# Altium PCB 20K Control Board V1.1.PcbDoc (part 18 of 24)
Units mm, origin at the board's own origin, x right, y up, seen from the top; angles counter-clockwise.
Board outline 132 x 260 mm, 4 copper layers (Top Layer, GND, VCC, Bottom Layer); 1384 components, 779 nets, 4515 pads, 1774 vias.
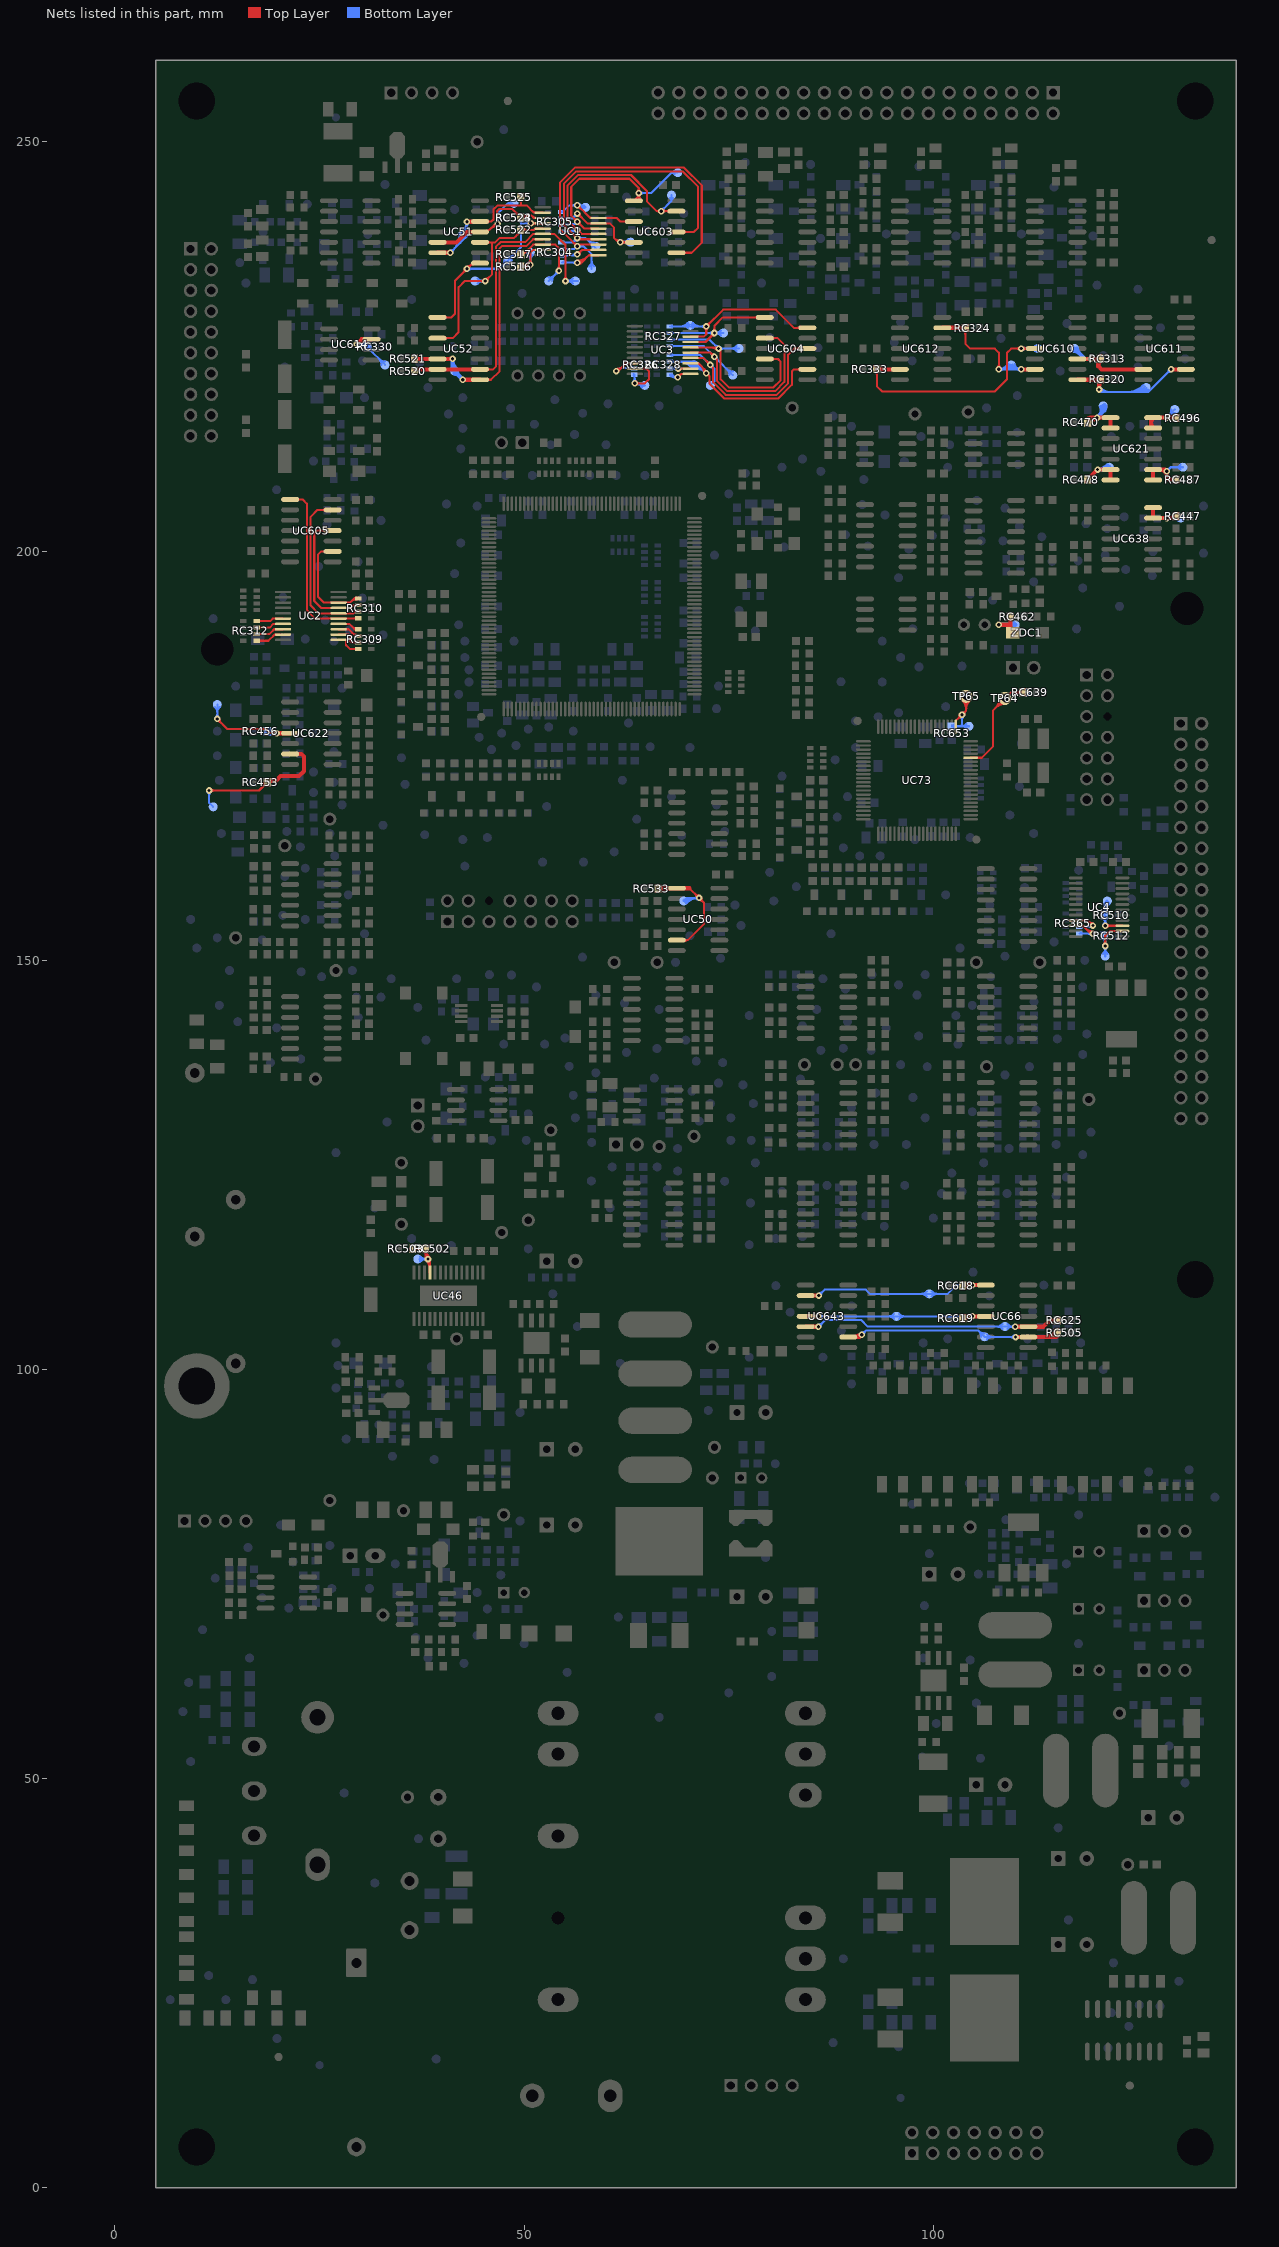
[diagram p20: the nets of this part, all layers, seen from the top]

## Via types
v1: diameter 0.8, hole 0.4, Top Layer to Bottom Layer, tented both sides, 1354 vias
v2: diameter 1.2, hole 0.7, Top Layer to Bottom Layer, 261 vias
v3: diameter 0.8, hole 0.4, Top Layer to Bottom Layer, 58 vias
v4: diameter 1.2, hole 0.7, Top Layer to Bottom Layer, tented top, 58 vias
v5: diameter 0.8, hole 0.4, Top Layer to Bottom Layer, tented top, 22 vias
v6: diameter 1.2, hole 0.7, Top Layer to Bottom Layer, tented both sides, 13 vias
v7: diameter 1.2, hole 0.7, Top Layer to Bottom Layer, tented bottom, 8 vias

## Nets (pads, with @x,y where several pads share a name; then routed paths per layer and width w, separated by ;. In a path a pad name is that pad's centre, name@x,y a point inside that pad or via, vN(x,y) a via of type N, cw(c..) or ccw(c..) an arc to the next point about the centre after c; other vN are vias at no path point) (continued)
NetRC304_1: pad.ICT@58.75,237.25 RC304.1 UC1.14 UC603.11 | length 47.2
  Top Layer w0.25: 55.987,238.737 ccw(c56.5,239.25) v1@56.5,238.525 ; 56.048,238.676 cw(c55.622,238.25) v1@56.225,238.25 ; UC1.14@59.079,238.104 56.646,238.104 v1(56.5,238.25) 56.475,238.25 54.85,239.875 54.85,244.876 56.375,246.4 56.375,246.406 69.344,246.406 71.25,244.5 71.25,239.5 70.75,239 UC603.11@68.6,239 ; UC603.11@69.524,238.876 cw(c69.822,238.578) 69.822,239 cw(c69.822,239.422) UC603.11@69.524,239.124
  Bottom Layer w0.25: RC304.1@54.55,237.7 55.925,237.7 56.475,238.25 v1(56.5,238.25) 57.5,238.25 pad.ICT@58.75,237 ; RC304.1@54.788,237.612 cw(c55.002,237.398) 55.002,237.7 cw(c55.002,238.002) RC304.1@54.788,237.788 ; 55.987,237.763 cw(c56.5,237.25) v1@56.5,237.975 ; 56.048,237.824 ccw(c55.622,238.25) v1@56.225,238.25 ; v1@56.694,238.056 cw(c57.164,237.586) 57.164,238.25 cw(c57.164,238.914) v1@56.694,238.444 ; 57.625,238.125 ccw(c58.712,239.212) pad.ICT@58.742,237.675 ; 58.04,237.71 ccw(c58.728,238.397) pad.ICT@58.747,237.425 ; 58.201,237.549 cw(c57.903,237.25) pad.ICT@58.325,237.25
NetRC304_2: pad.ICT@58.25,234.5 RC304.2 UC1.13 UC603.9 | length 51.8
  Top Layer w0.25: 55.987,237.737 ccw(c56.5,238.25) v1@56.5,237.525 ; 56.048,237.676 cw(c55.622,237.25) v1@56.225,237.25 ; UC1.13@59.079,237.454 56.704,237.454 v1(56.5,237.25) 56.475,237.25 54.4,239.325 54.4,245.068 56.187,246.854 56.187,246.86 67.75,246.86 ; 67.75,246.856 69.53,246.856 71.7,244.686 71.7,237.7 70.46,236.46 UC603.9@68.6,236.46 ; UC603.9@69.524,236.336 cw(c69.822,236.038) 69.822,236.46 cw(c69.822,236.882) UC603.9@69.524,236.584
  Bottom Layer w0.25: RC304.2@54.55,236.9 56.125,236.9 56.475,237.25 v1(56.5,237.25) 57.25,237.25 58.25,236.25 pad.ICT@58.25,234.5 ; RC304.2@54.788,236.812 cw(c55.002,236.598) 55.002,236.9 cw(c55.002,237.202) RC304.2@54.788,236.988 ; v1@56.694,237.056 cw(c57.164,236.586) 57.164,237.25 cw(c57.164,237.914) v1@56.694,237.444 ; pad.ICT@57.949,234.801 ccw(c57.224,235.526) 58.25,235.526 ccw(c59.276,235.526) pad.ICT@58.551,234.801
NetRC304_3: RC304.3 UC1.12 | length 7.7
  Top Layer w0.25: v1@56.5,236.525 ccw(c56.5,237.25) 57.013,236.737 ; v1@56.525,236.25 57.079,236.804 UC1.12@59.079,236.804 ; v1@56.775,236.25 cw(c57.378,236.25) 56.952,236.676
  Bottom Layer w0.25: RC304.3@54.55,236.1 56.35,236.1 v1(56.5,236.25) ; RC304.3@54.788,236.012 cw(c55.002,235.798) 55.002,236.1 cw(c55.002,236.402) RC304.3@54.788,236.188 ; 55.474,236.1 ccw(c55.474,237.276) v1@56.306,236.444 ; 56.078,236.1 ccw(c56.078,236.672) v1@56.482,236.268
NetRC304_4: RC304.4 UC1.11 | length 9.9
  Top Layer w0.25: v1@56.5,235.025 ccw(c56.5,235.689) 56.969,235.219 ; v1(56.5,235.25) 57,235.25 57.904,236.154 UC1.11@59.079,236.154 ; v1@56.5,235.275 ccw(c56.5,236.542) 57.396,235.646 ; v1@56.5,235.525 ccw(c56.5,237.396) 57.823,236.073 ; v1@56.732,235.103 cw(c57,234.933) 57,235.25 cw(c57,235.567) v1@56.732,235.397
  Bottom Layer w0.25: RC304.4@54.6,235.25 v1(56.5,235.25) ; RC304.4@54.788,235.388 ccw(c55.122,235.722) 55.122,235.25 ; v1@56.306,235.056 ccw(c55.836,234.586) 55.836,235.25 ccw(c55.836,235.914) v1@56.306,235.444
NetRC305_1: pad.8@57.5,242 RC305.1 UC1.18 UC603.3 | length 19.2
  Top Layer w0.25: v1(56.5,242.25) 56.525,242.25 58.071,240.704 UC1.18@59.079,240.704 61.296,240.704 61.73,240.27 UC603.3@63.4,240.27 ; 57.917,240.858 ccw(c58.229,241.17) UC1.18@58.229,240.729 ; UC603.3@62.476,240.146 ccw(c62.178,239.848) 62.178,240.27 ccw(c62.178,240.692) UC603.3@62.476,240.394 ; v1@56.5,241.975 cw(c56.5,241.25) 57.013,241.763 ccw(c56.5,241.25) v1@56.5,241.975 ; v1@56.775,242.25 ccw(c57.378,242.25) 56.952,241.824 cw(c57.378,242.25) v1@56.775,242.25
  Bottom Layer w0.25: RC305.1@54.55,241.45 54.7,241.45 55.5,242.25 v1(56.5,242.25) ; RC305.1@54.7,241.575 ccw(c54.7,241.877) 54.913,241.663 ccw(c55.127,241.45) RC305.1@54.825,241.45 ; v1@56.694,242.056 cw(c57.164,241.586) 57.164,242.25 cw(c57.164,242.914) v1@56.694,242.444 ; v1@56.87,242.25 cw(c56.87,241.746) pad.8@57.338,241.935 ; pad.8@57.106,241.841 ccw(c56.5,241.597) v1(56.5,242.25) ; pad.8@57.5,242 57.25,242.25 v1(56.5,242.25) ; 55.836,242.25 ccw(c55.836,242.914) 56.306,242.444 cw(c55.836,242.914) 55.836,242.25 ; 55.836,242.25 cw(c55.836,241.586) 56.306,242.056 ccw(c55.836,241.586) 55.836,242.25
NetRC305_2: pad.ICT@63,237.75 RC305.2 UC1.17 UC603.5 | length 20
  Top Layer w0.25: v1@56.5,240.975 cw(c56.5,240.25) 57.013,240.763 ; v1(56.5,241.25) 56.525,241.25 57.721,240.054 UC1.17@59.079,240.054 60.446,240.054 61,239.5 61,238.25 61.52,237.73 UC603.5@63.4,237.73 ; v1@56.775,241.25 ccw(c57.378,241.25) 56.952,240.824 ; 61.125,238.125 ccw(c61.482,238.482) v1@61.655,238.008 ; v1@61.944,237.556 cw(c62.366,237.134) UC603.5@62.366,237.73 ; v1@61.944,237.944 ccw(c62.462,238.462) UC603.5@62.462,237.73 ; UC603.5@62.476,237.606 ccw(c62.178,237.308) 62.178,237.73 ccw(c62.178,238.152) UC603.5@62.476,237.854
  Bottom Layer w0.25: RC305.2@54.55,240.65 55.875,240.65 56.475,241.25 v1(56.5,241.25) ; RC305.2@54.788,240.562 cw(c55.002,240.348) 55.002,240.65 cw(c55.002,240.952) RC305.2@54.788,240.738 ; 55.987,240.763 cw(c56.5,240.25) v1@56.5,240.975 ; 56.048,240.824 ccw(c55.622,241.25) v1@56.225,241.25 ; v1(61.75,237.75) pad.ICT@63,237.75 ; v1@61.944,237.556 cw(c62.414,237.086) 62.414,237.75 cw(c62.414,238.414) v1@61.944,237.944 ; pad.ICT@62.699,237.449 ccw(c61.974,236.724) 61.974,237.75 ccw(c61.974,238.776) pad.ICT@62.699,238.051
NetRC305_3: pad.ICT@68.75,246.25 RC305.3 UC1.16 UC603.1 | length 34.9
  Top Layer w0.25: 55.987,240.737 ccw(c56.5,241.25) v1@56.5,240.525 ; 56.048,240.676 cw(c55.622,240.25) v1@56.225,240.25 ; v1@56.475,240.25 55.75,240.975 55.75,244.5 56.75,245.5 62.864,245.5 64,244.364 ; v1@56.5,239.975 cw(c56.5,239.25) 57.013,239.763 ; v1@56.525,240.25 57.371,239.404 UC1.16@59.079,239.404 ; v1@56.775,240.25 ccw(c57.378,240.25) 56.952,239.824 ; UC603.1@63.4,242.81 64,243.41 v1(64,243.75) ; v1@63.806,243.556 cw(c63.336,243.086) 64,243.086 cw(c64.664,243.086) v1@64.194,243.556 ; v1@63.817,243.955 ccw(c63.453,244.364) 64,244.364 ; UC603.1@64,243 v1(64,243.75) ; 64,243.112 ccw(c64.502,243.112) UC603.1@64.147,242.757 ; v1@64,243.715 ccw(c65.105,243.715) UC603.1@64.324,242.934 ; v1@64.183,243.955 cw(c64.547,244.364) 64,244.364 ; v1(64,243.75) 64,244.364
  Bottom Layer w0.25: RC305.3@54.55,239.85 54.675,239.975 56.225,239.975 v1(56.5,240.25) ; RC305.3@54.788,239.762 cw(c55.304,239.246) 55.304,239.975 ; v1(64,243.75) 65.5,243.75 68,246.25 ; v1@64.194,243.556 cw(c64.664,243.086) 64.664,243.75 cw(c64.664,244.414) v1@64.194,243.944 ; pad.ICT@68.385,246.032 ccw(c68,245.801) 68,246.25 ; pad.ICT@68.385,246.468 cw(c68,246.699) 68,246.25 ; pad.ICT@68.75,246.25 68,246.25
NetRC305_4: pad.ICT@68,243.5 RC305.4 UC1.15 UC603.13 | length 38.1
  Top Layer w0.25: 55.987,239.737 ccw(c56.5,240.25) v1@56.5,239.525 ; 56.048,239.676 cw(c55.622,239.25) v1@56.225,239.25 ; v1@56.475,239.25 55.3,240.425 55.3,244.686 56.563,245.949 ; v1@56.5,238.975 cw(c56.5,238.25) 57.013,238.763 ; v1@56.525,239.25 57.021,238.754 UC1.15@59.079,238.754 ; 56.563,245.952 63.048,245.952 65,244 65,242.75 66.21,241.54 ; v1@56.775,239.25 ccw(c57.378,239.25) 56.952,238.824 ; v1@66.528,241.378 ccw(c66.21,241.147) 66.21,241.54 ; v1@66.528,241.702 cw(c66.21,241.933) 66.21,241.54 ; v1@66.944,241.346 cw(c67.414,240.876) 67.414,241.54 cw(c67.414,242.204) v1@66.944,241.734 ; UC603.13@67.676,241.416 ccw(c67.378,241.118) 67.378,241.54 ccw(c67.378,241.962) UC603.13@67.676,241.664 ; UC603.13@68.6,241.54 v1(66.75,241.54) 66.21,241.54
  Bottom Layer w0.25: RC305.4@54.55,239.05 56.3,239.05 v1(56.5,239.25) ; RC305.4@54.788,238.962 cw(c55.002,238.748) 55.002,239.05 cw(c55.002,239.352) RC305.4@54.788,239.138 ; 55.353,239.05 ccw(c55.353,240.397) v1@56.306,239.444 ; 55.957,239.05 ccw(c55.957,239.793) v1@56.482,239.268 ; v1(66.75,241.54) 68,242.79 ; v1@66.75,241.815 ccw(c66.75,242.479) 67.219,242.009 ccw(c67.689,241.54) v1@67.025,241.54 ; pad.ICT@67.799,243.125 cw(c67.619,242.79) 68,242.79 ; pad.ICT@68,243.5 68,242.79 ; pad.ICT@68.201,243.125 ccw(c68.381,242.79) 68,242.79
NetRC309_1: RC309.1 UC2.14 | length 3.4
  Top Layer w0.25: UC2.14@27.329,191.104 28.646,191.104 29.3,190.45 RC309.1@29.7,190.45 ; 28.91,190.84 ccw(c29.55,191.48) RC309.1@29.55,190.575
NetRC309_2: RC309.2 UC2.13 | length 3.3
  Top Layer w0.25: UC2.13@27.329,190.454 28.546,190.454 29.35,189.65 RC309.2@29.7,189.65 ; 28.995,190.005 ccw(c29.55,190.56) RC309.2@29.55,189.775
NetRC309_3: RC309.3 UC2.12 | length 3.6
  Top Layer w0.25: UC2.12@27.329,189.804 28.56,189.804 28.75,189.614 28.75,189 28.9,188.85 RC309.3@29.7,188.85 ; RC309.3@29.462,188.762 ccw(c29.248,188.548) 29.248,188.85 ccw(c29.248,189.152) RC309.3@29.462,188.938
NetRC309_4: RC309.4 UC2.11 | length 4
  Top Layer w0.25: UC2.11@27.329,189.154 28.096,189.154 28.25,189 28.25,188.5 28.7,188.05 RC309.4@29.7,188.05 ; UC2.11@28.161,189.136 cw(c27.947,188.922) 28.25,188.922 ; UC2.11@28.166,189.133 cw(c28.077,188.984) 28.25,188.984 ; RC309.4@29.462,187.962 ccw(c29.248,187.748) 29.248,188.05 ccw(c29.248,188.352) RC309.4@29.462,188.138
NetRC310_1: RC310.1 UC2.18 UC605.9 | length 15.2
  Top Layer w0.25: UC605.9@25.676,199.836 ccw(c25.378,199.538) 25.378,199.96 ccw(c25.378,200.382) UC605.9@25.676,200.084 ; UC605.9@26.6,199.96 25.21,199.96 24.8,199.55 24.8,194.45 25.546,193.704 UC2.18@27.579,193.704 ; UC2.18@27.329,193.704 28.704,193.704 29.2,194.2 RC310.1@29.7,194.2 ; 28.739,193.739 cw(c29.55,192.928) RC310.1@29.55,194.075 ; 29.166,194.166 cw(c29.55,193.782) RC310.1@29.55,194.325 ; RC310.1@29.462,194.112 ccw(c29.248,193.898) 29.248,194.2 ccw(c29.248,194.502) RC310.1@29.462,194.288
NetRC310_2: RC310.2 UC2.17 UC605.11 | length 17.8
  Top Layer w0.25: UC605.11@25.676,202.376 ccw(c25.378,202.078) 25.378,202.5 ccw(c25.378,202.922) UC605.11@25.676,202.624 ; UC605.11@26.6,202.5 24.75,202.5 24.35,202.1 24.35,193.9 25.196,193.054 UC2.17@27.329,193.054 ; UC2.17@27.579,193.054 UC2.17@27.329,193.054 ; RC310.2@29.462,193.312 ccw(c29.248,193.098) 29.248,193.4 ccw(c29.248,193.702) RC310.2@29.462,193.488 ; RC310.2@29.7,193.4 29.15,193.4 28.804,193.054 UC2.17@27.329,193.054
NetRC310_3: RC310.3 UC2.16 UC605.13 | length 21.1
  Top Layer w0.25: UC605.13@25.676,204.916 ccw(c25.378,204.618) 25.378,205.04 ccw(c25.378,205.462) UC605.13@25.676,205.164 ; UC605.13@26.6,205.04 24.75,205.04 23.9,204.19 23.9,193.35 24.846,192.404 UC2.16@27.329,192.404 ; UC2.16@27.579,192.404 UC2.16@27.329,192.404 ; RC310.3@29.7,192.6 29.35,192.6 29.154,192.404 UC2.16@27.329,192.404
NetRC310_4: RC310.4 UC2.15 UC605.1 | length 23.4
  Top Layer w0.25: UC605.1@21.4,206.31 22.94,206.31 23.45,205.8 23.45,197.75 ; UC605.1@22.324,206.186 cw(c22.622,205.888) 22.622,206.31 cw(c22.622,206.732) UC605.1@22.324,206.434 ; 23.45,197.5 23.45,197.75 ; UC2.15@27.579,191.754 UC2.15@27.329,191.754 ; 29.137,191.754 ccw(c29.137,192.213) RC310.4@29.462,191.888 ; RC310.4@29.654,191.754 UC2.15@27.329,191.754 ; 23.45,197.75 23.45,192.8 24.496,191.754 UC2.15@27.329,191.754
NetRC312_1: RC312.1 UC2.9 | length 4.7
  Top Layer w0.25: RC312.1@17.3,189.05 18.746,189.05 19.5,189.804 UC2.9@20.529,189.804 ; RC312.1@17.538,188.962 cw(c17.752,188.748) 17.752,189.05 cw(c17.752,189.352) RC312.1@17.538,189.138 ; 19.331,189.635 cw(c19.679,189.287) UC2.9@19.679,189.779 ; 19.411,189.715 cw(c19.596,189.529) UC2.9@19.672,189.78
NetRC312_2: RC312.2 UC2.8 | length 4.8
  Top Layer w0.25: RC312.2@17.3,189.85 18.85,189.85 19.454,190.454 UC2.8@20.529,190.454 ; RC312.2@17.538,189.762 cw(c17.752,189.548) 17.752,189.85 cw(c17.752,190.152) RC312.2@17.538,189.938 ; 19.252,190.252 cw(c19.679,189.825) UC2.8@19.679,190.429 ; 19.342,190.342 cw(c19.583,190.1) UC2.8@19.672,190.43
NetRC312_3: RC312.3 UC2.7 | length 3.9
  Top Layer w0.25: RC312.3@17.3,190.65 18.9,190.65 19.354,191.104 UC2.7@20.529,191.104 ; RC312.3@17.538,190.562 cw(c17.752,190.348) 17.752,190.65 cw(c17.752,190.952) RC312.3@17.538,190.738
NetRC312_4: RC312.4 UC2.6 | length 3.8
  Top Layer w0.25: RC312.4@17.3,191.45 18.95,191.45 19.254,191.754 UC2.6@20.529,191.754 ; RC312.4@17.538,191.362 cw(c17.752,191.148) 17.752,191.45 cw(c17.752,191.752) RC312.4@17.538,191.538
NetRC313_1: pad.ICT@117.25,224.75 RC313.1 UC610.10 UC611.6 | length 13.5
  Top Layer w0.5: UC610.10@117.6,223.48 RC313.1@120.13,223.48 ; 119.869,223.48 ccw(c119.869,224.031) RC313.1@120.259,223.641 ; 120.15,222.564 cw(c121.047,222.564) RC313.1@120.518,223.288 ; RC313.1@120.15,223.5 120.15,222.6 120.54,222.21 UC611.6@125.15,222.21
  Bottom Layer w0.5: pad.ICT@117.25,224.45 cw(c117.25,223.726) 117.762,224.238 cw(c118.274,224.75) pad.ICT@117.55,224.75 ; pad.ICT@117.25,224.75 118.52,223.48 v1(119.25,223.48)
NetRC320_1: pad.ICT@126,220 RC320.1 UC610.8 UC611.9 | length 27.3
  Top Layer w0.5: UC610.8@117.6,220.94 120.34,220.94 120.25,220.85 v1(120.25,219.75) ; 119.893,220.94 ccw(c119.893,221.457) RC320.1@120.259,221.091 ; 119.941,220.94 cw(c119.941,220.491) RC320.1@120.259,220.809 ; v1@120.25,220.105 cw(c121.245,220.105) RC320.1@120.541,220.809 ; v1(129.04,222.21) UC611.9@130.85,222.21
  Bottom Layer w0.25: v1(120.25,219.75) 120.55,219.45 126.28,219.45 v1(129.04,222.21) ; v1@120.268,219.768 ccw(c121.035,220.535) 121.035,219.45 ; v1@120.444,219.944 ccw(c121.638,221.138) 121.638,219.45 ; 123.646,219.45 ccw(c123.646,222.354) pad.ICT@125.699,220.301 ; 124.25,219.45 ccw(c124.25,221.75) pad.ICT@125.876,220.124 ; 124.853,219.45 ccw(c124.853,221.147) pad.ICT@126.053,219.947 ; 125.457,219.45 ccw(c125.457,220.543) pad.ICT@126.23,219.77 ; 126.06,219.45 ccw(c126.06,219.94) 126.407,219.593 ; v1@128.765,222.21 cw(c128.101,222.21) 128.571,221.741 cw(c129.04,221.271) v1@129.04,221.935
NetRC324_1: pad.ICT@109.5,222.75 RC324.1 UC610.6 UC612.13 | length 31.6
  Top Layer w0.25: RC324.1@103.67,226.97 cw(c103.115,226.415) 103.9,226.415 cw(c104.685,226.415) RC324.1@104.13,226.97 ; RC324.1@103.9,227.25 103.9,225.35 104.5,224.75 107.5,224.75 108,224.25 v1(108,222.21) ; v1@107.806,222.404 ccw(c107.336,222.874) 108,222.874 ccw(c108.664,222.874) v1@108.194,222.404
  Top Layer w0.5: UC612.13@101.1,227.29 RC324.1@103.61,227.29 ; 103.393,227.29 ccw(c103.393,227.807) RC324.1@103.759,227.441 ; 103.441,227.29 cw(c103.441,226.841) RC324.1@103.759,227.159 ; v1(110.75,222.21) UC610.6@112.4,222.21
  Bottom Layer w0.25: v1@108.194,222.016 cw(c108.664,221.546) 108.664,222.21 cw(c108.664,222.874) v1@108.194,222.404 ; v1@108.389,222.21 ccw(c108.389,223.256) pad.ICT@109.341,222.823 ; 108.777,222.21 ccw(c108.777,223.079) pad.ICT@109.568,222.719 ; 108.944,222.604 ccw(c109.455,222.738) pad.ICT@109.455,222.21 ; 108.96,222.21 pad.ICT@109.5,222.75 110.04,222.21 ; pad.ICT@109.113,222.926 cw(c108,223.433) 108,222.21 v1(110.75,222.21) cw(c110.75,223.077) pad.ICT@109.911,222.858 ; 109.166,222.21 ccw(c109.166,222.902) pad.ICT@109.796,222.615 ; pad.ICT@109.186,222.668 ccw(c109.778,222.823) 109.778,222.21 ; pad.ICT@109.427,222.731 ccw(c110.102,222.908) 110.102,222.21 ; pad.ICT@109.554,222.21 ccw(c109.554,222.725) 110.023,222.512 ; pad.ICT@109.669,222.794 ccw(c110.426,222.992) v1@110.426,222.21 ; v1@110.556,222.016 ccw(c110.086,221.546) 110.086,222.21 ccw(c110.086,222.874) v1@110.556,222.404
NetRC326_1: pad.ICT@64.75,220.25 RC326.1 UC3.9 | length 12.6
  Top Layer w0.25: v1(63.5,220.5) 64.75,220.5 65.25,221 65.25,222 64.946,222.304 UC3.9@63.529,222.304 ; v1@63.694,220.306 cw(c64.164,219.836) 64.164,220.5 cw(c64.164,221.164) v1@63.694,220.694
  Bottom Layer w0.25: v1@63.306,220.694 ccw(c62.836,221.164) 63.5,221.164 ccw(c64.164,221.164) v1@63.694,220.694 ; RC326.1@63.349,221.651 RC326.1@63.45,221.55 ; RC326.1@63.362,221.462 cw(c63.028,221.128) 63.5,221.128 ; v1(63.5,220.5) RC326.1@63.5,221.5
  Bottom Layer w0.254: v1@63.693,220.307 cw(c64.159,219.841) 64.159,220.5 cw(c64.159,221.159) v1@63.693,220.693 ; 63.972,220.5 cw(c63.972,219.737) pad.ICT@64.609,220.157 ; pad.ICT@64.397,220.017 ccw(c63.5,219.426) v1(63.5,220.5) 64.5,220.5 pad.ICT@64.75,220.25
NetRC326_2: RC326.2 UC3.8 | length 7.8
  Top Layer w0.25: v1(61.25,222) 61.5,222 62.454,222.954 UC3.8@63.529,222.954 ; v1@61.25,222.025 ccw(c61.25,222.689) 61.719,222.219 ; v1@61.25,222.275 ccw(c61.25,223.542) 62.146,222.646 ; 62.252,222.752 cw(c62.679,222.325) UC3.8@62.679,222.929 ; 62.342,222.842 cw(c62.583,222.6) UC3.8@62.672,222.93
  Bottom Layer w0.25: v1(61.25,222) 61.275,222 61.625,222.35 RC326.2@63.45,222.35 ; RC326.2@63.212,222.262 ccw(c62.998,222.048) 62.998,222.35 ccw(c62.998,222.652) RC326.2@63.212,222.438
NetRC327_1: pad.ICT@70.3,227.583 RC327.1 UC3.18 UC604.13 | length 30.4
  Top Layer w0.25: UC3.18@70.329,226.204 71.954,226.204 72.25,226.5 v1(72.25,227.45) 74.3,229.5 80.75,229.5 82.96,227.29 UC604.13@84.6,227.29 ; v1@72.056,227.256 cw(c71.586,226.786) 72.25,226.786 cw(c72.914,226.786) v1@72.444,227.256 ; v1@72.25,227.725 ccw(c72.25,228.389) 72.719,227.919 ccw(c73.189,227.45) v1@72.525,227.45 ; UC604.13@83.676,227.166 ccw(c83.378,226.868) 83.378,227.29 ccw(c83.378,227.712) UC604.13@83.676,227.414
  Bottom Layer w0.25: RC327.1@67.8,227.45 v1(72.25,227.45) ; RC327.1@68.038,227.362 cw(c68.252,227.148) 68.252,227.45 cw(c68.252,227.752) RC327.1@68.038,227.538 ; 68.953,227.45 ccw(c68.953,228.93) pad.ICT@69.999,227.884 ; 69.556,227.45 ccw(c69.556,228.327) pad.ICT@70.176,227.707 ; 69.595,227.45 cw(c69.595,226.878) pad.ICT@69.999,227.282 ; pad.ICT@70.424,227.707 ccw(c71.044,228.327) 71.044,227.45 ; pad.ICT@70.601,227.282 cw(c71.005,226.878) 71.005,227.45 ; pad.ICT@70.601,227.884 ccw(c71.647,228.93) 71.647,227.45 ; v1@72.056,227.256 ccw(c71.586,226.786) 71.586,227.45 ccw(c71.586,228.114) v1@72.056,227.644
NetRC327_2: pad.ICT@74.35,226.65 RC327.2 UC3.17 UC604.1 | length 24.3
  Top Layer w0.25: UC3.17@70.329,225.554 72.154,225.554 v1(73.25,226.65) 73.25,227.56 74.25,228.56 UC604.1@79.4,228.56 ; v1@72.975,226.65 cw(c72.311,226.65) 72.781,226.181 cw(c73.25,225.711) v1@73.25,226.375 ; v1@73.056,226.844 ccw(c72.586,227.314) 73.25,227.314 ccw(c73.914,227.314) v1@73.444,226.844 ; UC604.1@78.476,228.436 ccw(c78.178,228.138) 78.178,228.56 ccw(c78.178,228.982) UC604.1@78.476,228.684
  Bottom Layer w0.25: RC327.2@67.8,226.65 v1(73.25,226.65) pad.ICT@74.35,226.65 ; RC327.2@68.038,226.562 cw(c68.252,226.348) 68.252,226.65 cw(c68.252,226.952) RC327.2@68.038,226.738 ; v1@73.056,226.456 ccw(c72.586,225.986) 72.586,226.65 ccw(c72.586,227.314) v1@73.056,226.844 ; v1@73.444,226.456 cw(c73.914,225.986) 73.914,226.65 cw(c73.914,227.314) v1@73.444,226.844 ; pad.ICT@74.049,226.349 ccw(c73.324,225.624) 73.324,226.65 ccw(c73.324,227.676) pad.ICT@74.049,226.951
NetRC327_3: pad.ICT@76.25,224.75 RC327.3 UC3.16 UC604.5 | length 34.7
  Top Layer w0.25: UC3.16@70.329,224.904 v1@73.596,224.904 ; 72.714,224.904 cw(c72.714,223.714) v1@73.556,224.556 ; 73.318,224.904 cw(c73.318,224.318) v1@73.732,224.732 ; v1(73.75,224.75) 74,224.5 74,221 75,220 80.469,220 81.344,220.875 81.344,223.156 81.02,223.48 UC604.5@79.4,223.48 ; UC604.5@80.324,223.356 cw(c80.622,223.058) 80.622,223.48 cw(c80.622,223.902) UC604.5@80.324,223.604
  Bottom Layer w0.25: RC327.3@67.8,225.85 72.65,225.85 v1(73.75,224.75) pad.ICT@76.25,224.75 ; RC327.3@68.038,225.762 cw(c68.252,225.548) 68.252,225.85 cw(c68.252,226.152) RC327.3@68.038,225.938 ; v1@73.475,224.75 ccw(c72.811,224.75) 73.281,225.219 ccw(c73.75,225.689) v1@73.75,225.025 ; v1@73.944,224.556 cw(c74.414,224.086) 74.414,224.75 cw(c74.414,225.414) v1@73.944,224.944 ; pad.ICT@75.949,224.449 ccw(c75.224,223.724) 75.224,224.75 ccw(c75.224,225.776) pad.ICT@75.949,225.051
NetRC327_4: pad.ICT@75.5,221.5 RC327.4 UC3.15 UC604.3 | length 37.3
  Top Layer w0.25: UC3.15@70.329,224.254 72.746,224.254 v1(73.25,223.75) ; v1@72.975,223.75 ccw(c72.311,223.75) 72.781,224.219 ccw(c73.25,224.689) v1@73.25,224.025 ; 73.548,223.452 73.548,220.816 74.814,219.55 80.655,219.55 81.796,220.691 81.796,225.204 80.98,226.02 UC604.3@79.4,226.02 ; UC604.3@80.324,225.896 cw(c80.622,225.598) 80.622,226.02 cw(c80.622,226.442) UC604.3@80.324,226.144
  Bottom Layer w0.25: RC327.4@67.8,225.05 71.95,225.05 v1(73.25,223.75) pad.ICT@75.5,221.5 ; RC327.4@68.038,224.962 cw(c68.252,224.748) 68.252,225.05 cw(c68.252,225.352) RC327.4@68.038,225.138 ; v1@72.975,223.75 ccw(c72.311,223.75) 72.781,224.219 ccw(c73.25,224.689) v1@73.25,224.025 ; v1@73.25,223.475 cw(c73.25,222.811) 73.719,223.281 cw(c74.189,223.75) v1@73.525,223.75 ; pad.ICT@75.075,221.5 ccw(c74.049,221.5) 74.774,222.226 ccw(c75.5,222.951) pad.ICT@75.5,221.925
NetRC328_1: pad.ICT@72.75,220.25 RC328.1 UC3.14 UC604.11 | length 34.5
  Top Layer w0.25: UC3.14@70.329,223.604 71.896,223.604 v1(72.75,222.75) 73.094,222.406 73.094,220.633 74.627,219.1 80.842,219.1 ; v1@72.475,222.75 ccw(c71.811,222.75) 72.281,223.219 ccw(c72.75,223.689) v1@72.75,223.025 ; 80.847,219.094 82.25,220.497 82.25,224 83,224.75 UC604.11@84.6,224.75 ; UC604.11@83.676,224.626 ccw(c83.378,224.328) 83.378,224.75 ccw(c83.378,225.172) UC604.11@83.676,224.874
  Bottom Layer w0.25: RC328.1@67.8,223.95 71.55,223.95 v1(72.75,222.75) ; RC328.1@68.038,223.862 cw(c68.252,223.648) 68.252,223.95 cw(c68.252,224.252) RC328.1@68.038,224.038 ; v1@72.475,222.75 ccw(c71.811,222.75) 72.281,223.219 ccw(c72.75,223.689) v1@72.75,223.025 ; pad.ICT@72.75,220.25 73.25,220.75 73.25,222.25 v1(72.75,222.75) ; v1@72.75,222.475 cw(c72.75,221.811) 73.219,222.281 cw(c73.689,222.75) v1@73.025,222.75 ; v1@73,222.5 v1(72.75,222.75)
NetRC328_2: pad.ICT@70.75,222.75 RC328.2 UC3.13 UC604.9 | length 36.2
  Top Layer w0.25: UC3.13@70.329,222.954 71.296,222.954 72.25,222 v1(72.25,221.75) 72.644,221.356 72.644,220.447 74.446,218.644 81.034,218.644 82.7,220.311 82.7,220.313 ; UC3.13@71.179,222.929 cw(c71.179,222.586) 71.421,222.829 ; 71.604,222.646 cw(c70.708,221.75) v1@71.975,221.75 ; 72.031,222.219 cw(c71.561,221.75) v1@72.225,221.75 ; 82.702,220.313 82.702,221.952 82.96,222.21 UC604.9@84.6,222.21 ; UC604.9@83.676,222.086 ccw(c83.378,221.788) 83.378,222.21 ccw(c83.378,222.632) UC604.9@83.676,222.334
  Bottom Layer w0.25: RC328.2@67.8,223.15 70.85,223.15 v1(72.25,221.75) ; RC328.2@68.038,223.062 cw(c68.252,222.848) 68.252,223.15 cw(c68.252,223.452) RC328.2@68.038,223.238 ; 68.758,223.15 cw(c68.758,220.758) pad.ICT@70.449,222.449 ; 69.362,223.15 cw(c69.362,221.362) pad.ICT@70.626,222.626 ; 69.965,223.15 cw(c69.965,221.965) pad.ICT@70.803,222.803 ; pad.ICT@70.75,222.325 cw(c70.75,220.092) v1@72.329,221.671 ; pad.ICT@70.75,222.575 cw(c70.75,220.945) 71.902,222.098 ; pad.ICT@70.75,222.825 cw(c70.75,221.799) 71.476,222.524 ; v1@71.975,221.75 ccw(c71.311,221.75) 71.781,222.219 ccw(c72.25,222.689) v1@72.25,222.025
NetRC328_3: RC328.3 UC3.12 | length 4.9
  Top Layer w0.25: v1(68.804,222.304) UC3.12@70.329,222.304 ; v1@68.998,222.11 cw(c69.468,221.64) 69.468,222.304 cw(c69.468,222.968) v1@68.998,222.498
  Bottom Layer w0.25: RC328.3@67.846,222.304 v1(68.804,222.304) ; RC328.3@68.038,222.438 ccw(c68.363,222.763) 68.363,222.304 ; v1@68.61,222.11 ccw(c68.14,221.64) 68.14,222.304 ccw(c68.14,222.968) v1@68.61,222.498
NetRC328_4: RC328.4 UC3.11 | length 5.7
  Top Layer w0.25: v1(68.75,221.25) 68.778,221.25 69.182,221.654 ; v1@68.788,221.522 ccw(c68.853,221.983) 69.182,221.654 ; v1@69.025,221.258 cw(c69.562,221.274) 69.182,221.654 ; UC3.11@70.329,221.654 69.182,221.654
  Bottom Layer w0.25: RC328.4@67.8,221.55 67.95,221.55 68.25,221.25 ; RC328.4@67.846,221.48 ccw(c68.279,221.773) 68.279,221.25 ; RC328.4@68.054,221.62 ccw(c68.75,222.09) v1(68.75,221.25) 68.25,221.25 ; v1@68.518,221.103 ccw(c68.25,220.933) 68.25,221.25 ; v1@68.518,221.397 cw(c68.25,221.567) 68.25,221.25
NetRC330_2: pad.ICT@33,222.75 RC330.2 UC614.7 | length 11.9
  Top Layer w0.5: v1(29.5,225.25) 30.135,225.885 UC614.7@31.35,225.885 ; v1@29.756,225.506 cw(c30.55,224.712) UC614.7@30.55,225.835 ; 29.928,225.678 cw(c30.368,225.237) UC614.7@30.536,225.837
  Bottom Layer w0.25: RC330.2@30.9,224.625 cw(c30.9,224.082) 31.284,224.466 ; RC330.2@30.9,225 30.9,224.85 pad.ICT@33,222.75 ; RC330.2@31.225,224.95 ccw(c32.251,224.95) 31.526,224.224 ; pad.ICT@32.575,222.75 ccw(c31.549,222.75) 32.274,223.476 ccw(c33,224.201) pad.ICT@33,223.175
  Bottom Layer w0.5: v1(29.5,225.25) RC330.2@30.9,225.25 ; 29.934,225.25 cw(c29.934,224.084) RC330.2@30.759,224.909
NetRC333_1: pad.ICT@112.75,224.75 RC333.1 UC610.4 UC612.6 | length 37.9
  Top Layer w0.25: RC333.1@92.87,221.97 cw(c92.315,221.415) 93.1,221.415 cw(c93.885,221.415) RC333.1@93.33,221.97 ; RC333.1@93.1,222.25 93.1,220.15 93.75,219.5 107.5,219.5 109,221 109,224.25 109.5,224.75 UC610.4@112.4,224.75 ; v1@110.556,224.556 ccw(c110.086,224.086) 110.086,224.75 ccw(c110.086,225.414) v1@110.556,224.944 ; v1@110.944,224.556 cw(c111.414,224.086) 111.414,224.75 cw(c111.414,225.414) v1@110.944,224.944 ; UC610.4@111.476,224.626 ccw(c111.178,224.328) 111.178,224.75 ccw(c111.178,225.172) UC610.4@111.476,224.874
  Top Layer w0.5: RC333.1@93.14,222.21 UC612.6@95.9,222.21 ; RC333.1@93.241,222.059 cw(c93.607,221.693) 93.607,222.21 ; RC333.1@93.241,222.341 ccw(c93.559,222.659) 93.559,222.21
  Bottom Layer w0.25: v1(110.75,224.75) pad.ICT@112.75,224.75 ; v1@110.944,224.556 cw(c111.414,224.086) 111.414,224.75 cw(c111.414,225.414) v1@110.944,224.944 ; pad.ICT@112.449,224.449 ccw(c111.724,223.724) 111.724,224.75 ccw(c111.724,225.776) pad.ICT@112.449,225.051
NetRC365_7: RC365.7 UC4.9 | length 7
  Top Layer w0.25: UC4.9@117.4,154.875 118.85,154.875 v1@119.475,154.25 ; 118.987,154.737 ccw(c119.5,155.25) v1@119.5,154.525 ; 119.048,154.676 cw(c118.622,154.25) v1@119.225,154.25
  Bottom Layer w0.25: RC365.7@117.8,154.1 119.35,154.1 v1(119.5,154.25) ; RC365.7@118.038,154.012 cw(c118.252,153.798) 118.252,154.1 cw(c118.252,154.402) RC365.7@118.038,154.188 ; 118.474,154.1 ccw(c118.474,155.276) v1@119.306,154.444 ; 119.078,154.1 ccw(c119.078,154.672) v1@119.482,154.268
NetRC365_8: RC365.8 UC4.10 | length 7.9
  Top Layer w0.25: UC4.10@117.4,154.225 118.275,154.225 119.25,153.25 v1(119.5,153.25) ; UC4.10@118.075,154.175 cw(c118.075,153.571) 118.502,153.998 ; UC4.10@118.095,154.179 cw(c118.195,153.945) 118.375,154.125 ; 118.604,153.896 ccw(c119.5,154.792) v1@119.5,153.525 ; 119.031,153.469 ccw(c119.5,153.939) v1@119.5,153.275
  Bottom Layer w0.25: RC365.8@117.85,153.25 v1(119.5,153.25) ; RC365.8@118.038,153.388 ccw(c118.372,153.722) 118.372,153.25 ; v1@119.306,153.056 ccw(c118.836,152.586) 118.836,153.25 ccw(c118.836,153.914) v1@119.306,153.444
NetRC447_2: pad.ICT@130.21,204.04 RC447.2 UC638.13 UC638.14 | length 9
  Top Layer w0.5: UC638.14@126.85,205.31 UC638.13@126.85,204.04 RC447.2@129.44,204.04 ; v1@128.781,204.04 ccw(c128.781,205.069) RC447.2@129.509,204.341
  Bottom Layer w0.25: v1(128.5,204.04) pad.ICT@130.21,204.04 ; v1@128.694,203.846 cw(c129.164,203.376) 129.164,204.04 cw(c129.164,204.704) v1@128.694,204.234 ; pad.ICT@129.909,203.739 ccw(c129.184,203.014) 129.184,204.04 ccw(c129.184,205.066) pad.ICT@129.909,204.341
NetRC453_2: pad.ICT@12,168.75 RC453.2 UC622.6 | length 23.7
  Top Layer w0.25: v1(11.5,170.75) 17.6,170.75 RC453.2@18.6,171.75 ; v1@11.694,170.556 cw(c12.164,170.086) 12.164,170.75 cw(c12.164,171.414) v1@11.694,170.944 ; 17.96,171.11 cw(c18.6,170.47) RC453.2@18.6,171.375 ; 18.081,171.231 ccw(c17.611,171.7) RC453.2@18.275,171.7
  Top Layer w0.5: RC453.2@18.6,172 19.25,172 ; RC453.2@18.741,171.659 cw(c19.566,170.834) 19.566,172 ; UC622.6@21.4,175.21 22.79,175.21 23.1,174.9 23.1,173.1 22.5,172.5 20.25,172.5 19.75,172 19.25,172 ; 19.25,172 ccw(c19.25,171.472) 18.779,171.71 cw(c19.25,171.472) 19.25,172
  Bottom Layer w0.25: v1@11.306,170.556 cw(c10.836,170.086) 11.5,170.086 cw(c12.164,170.086) v1@11.694,170.556 ; v1(11.5,170.75) 11.5,169.25 pad.ICT@12,168.75
NetRC456_2: pad.ICT@12.5,181.25 RC456.2 UC622.4 | length 18.3
  Top Layer w0.25: v1@12.5,179.225 cw(c12.5,178.561) 12.969,179.031 cw(c13.439,179.5) v1@12.775,179.5 ; v1(12.5,179.5) 13.75,178.25 18.5,178.25 19,177.75 v1(19.75,177.75) ; v1@19.556,177.556 ccw(c19.086,177.086) 19.086,177.75 ccw(c19.086,178.414) v1@19.556,177.944
  Top Layer w0.5: v1(19.75,177.75) UC622.4@21.4,177.75
  Bottom Layer w0.25: pad.ICT@12.199,180.949 cw(c11.474,180.224) 12.5,180.224 cw(c13.526,180.224) pad.ICT@12.801,180.949 ; v1@12.306,179.694 ccw(c11.836,180.164) 12.5,180.164 ccw(c13.164,180.164) v1@12.694,179.694 ; v1(12.5,179.5) pad.ICT@12.5,181.25
  Bottom Layer w0.5: RC456.2@18.6,178 18.85,177.75 v1(19.75,177.75) ; RC456.2@18.741,178.091 ccw(c19.566,178.916) v1@19.566,177.75
NetRC462_2: pad.ICT@110,191 RC462.2 ZDC1.1 | length 7.7
  Top Layer w0.5: v1(108,191) 109.4,191 ; RC462.2@109.259,191.809 cw(c108.917,191.467) 109.4,191.467 cw(c109.883,191.467) RC462.2@109.541,191.809 ; ZDC1.1@109.4,190.3 109.4,191 ; RC462.2@109.4,192 109.4,191 ; ZDC1.1@109.783,190.411 cw(c110.044,191) 109.4,191
  Bottom Layer w0.5: v1(108,191) pad.ICT@110,191 ; pad.ICT@109.787,190.787 ccw(c109.275,190.275) 109.275,191 ccw(c109.275,191.724) pad.ICT@109.787,191.212
NetRC470_2: pad.ICT@120.75,217.75 RC470.2 UC621.1 UC621.2 | length 14.2
  Top Layer w0.5: RC470.2@118.638,216.012 cw(c119.357,215.293) 119.357,216.31 ; RC470.2@118.737,215.637 cw(c120,214.373) v1@120,216.16 ; RC470.2@118.85,215.75 119.41,216.31 UC621.1@121.65,216.31 UC621.2@121.65,215.04 ; RC470.2@118.85,216 ccw(c118.85,216.604) RC470.2@119.277,216.177 ; RC470.2@118.991,215.659 cw(c120.564,214.086) UC621.1@120.564,216.31 ; RC470.2@119.115,216.015 cw(c119.643,215.487) v1@119.94,216.172
  Bottom Layer w0.5: v1(120,216.31) 120.75,217.06 ; 120.345,216.655 ccw(c119.774,217.226) pad.ICT@120.486,217.608 ; pad.ICT@120.545,217.531 cw(c120.107,217.06) 120.75,217.06 ; pad.ICT@120.75,217.75 120.75,217.06 ; 120.821,217.131 ccw(c120.393,217.559) pad.ICT@120.926,217.845 ; pad.ICT@120.955,217.531 ccw(c121.393,217.06) 120.75,217.06
NetRC478_2: pad.ICT@121.5,210.25 RC478.2 UC621.6 UC621.7 | length 8
  Top Layer w0.5: RC478.2@118.85,209 ccw(c118.85,209.604) RC478.2@119.277,209.177 ; RC478.2@118.91,208.69 RC478.2@118.85,208.75 v1(120.06,209.96) UC621.6@121.65,209.96 UC621.7@121.65,208.69
  Bottom Layer w0.5: v1(120.06,209.96) 121.21,209.96 pad.ICT@121.5,210.25 ; v1@120.076,209.96 ccw(c120.076,211.674) pad.ICT@121.288,210.462
NetRC487_2: pad.ICT@130.5,210.25 RC487.2 UC621.8 UC621.9 | length 12.4
  Top Layer w0.5: UC621.8@126.85,208.69 UC621.9@126.85,209.96 ; UC621.9@127.631,209.96 cw(c127.631,208.881) v1@128.394,209.644 ; UC621.9@127.79,209.96 UC621.9@126.85,209.96 ; RC487.2@129.509,208.609 ccw(c129.167,208.267) 129.167,208.75 ccw(c129.167,209.233) RC487.2@129.509,208.891 ; RC487.2@129.65,208.75 128.75,208.75 128.5,209 v1(128.5,209.75) 128.29,209.96 UC621.9@126.85,209.96
  Bottom Layer w0.25: v1(128.5,209.75) 129,210.25 pad.ICT@130.5,210.25 ; v1@128.5,210.025 ccw(c128.5,210.689) 128.969,210.219 ccw(c129.439,209.75) v1@128.775,209.75 ; pad.ICT@130.199,209.949 ccw(c129.474,209.224) 129.474,210.25 ccw(c129.474,211.276) pad.ICT@130.199,210.551
NetRC496_2: pad.ICT@129.5,217.31 RC496.2 UC621.13 UC621.14 | length 10.7
  Top Layer w0.5: UC621.13@126.6,215.04 126.6,216.31 RC496.2@129.65,216.31 ; 126.6,215.586 cw(c127.574,215.586) UC621.14@126.885,216.275 ; 126.6,215.764 ccw(c127.574,215.764) UC621.13@126.885,215.075 ; 129.143,216.31 cw(c129.143,215.793) RC496.2@129.509,216.159 ; 129.191,216.31 ccw(c129.191,216.759) RC496.2@129.509,216.441
  Bottom Layer w0.25: v1(128.5,216.31) pad.ICT@129.5,217.31 ; v1@128.5,216.585 ccw(c128.5,217.249) 128.969,216.779 ccw(c129.439,216.31) v1@128.775,216.31 ; pad.ICT@129.075,217.31 cw(c128.049,217.31) 128.774,216.584 cw(c129.5,215.859) pad.ICT@129.5,216.885
NetRC502_1: pad.ICT@37,113.5 RC502.1 RC503.2 UC46.25 | length 15
  Top Layer w0.3: RC503.2@36.3,114.75 38,114.75 38,113.75 38.475,113.275 UC46.25@38.475,111.85 ; RC503.2@36.562,114.538 cw(c37.074,114.026) 37.074,114.75 cw(c37.074,115.474) RC503.2@36.562,114.962 ; RC502.1@37.688,114.538 ccw(c37.176,114.026) 37.176,114.75 ccw(c37.176,115.474) RC502.1@37.688,114.962 ; RC502.1@37.69,114.486 cw(c36.96,113.745) v1@38,113.745 ; 38,113.983 ccw(c38.733,113.983) v1@38.215,113.465 ; 38,114.217 cw(c38.383,114.217) RC502.1@38.112,114.488 ; RC502.1@38,114.707 ccw(c39.457,114.707) v1@38.427,113.677 ; v1@38.073,113.323 cw(c37.103,112.353) UC46.25@38.475,112.353 ; v1@38.285,113.535 cw(c37.828,113.078) 38.475,113.078
  Bottom Layer w0.3: pad.ICT@37.25,113.5 v1(38.25,113.5) ; pad.ICT@37.283,113.217 cw(c37.966,112.534) 37.966,113.5 cw(c37.966,114.466) pad.ICT@37.283,113.783 ; v1@38.073,113.323 ccw(c37.646,112.896) 37.646,113.5 ccw(c37.646,114.104) v1@38.073,113.677
NetRC505_2: pad.ICT@106.25,104 RC505.2 UC66.9 UC643.9 | length 35.7
  Top Layer w0.5: UC643.9@89.6,103.96 90.96,103.96 v1(91.25,104.25) ; UC643.9@90.188,103.96 ccw(c90.188,105.312) v1@91.144,104.356 ; v1(110.04,103.96) UC66.9@111.6,103.96 114.61,103.96 RC505.2@115.15,104.5 ; 113.484,103.96 ccw(c113.484,106.116) RC505.2@115.009,104.591 ; 114.691,103.96 ccw(c114.691,104.909) RC505.2@115.362,104.238 ; RC505.2@114.723,104.073 cw(c115.15,103.646) RC505.2@115.15,104.25
  Bottom Layer w0.25: v1(91.25,104.25) 91.75,104.75 105.5,104.75 pad.ICT@106.25,104 106.29,103.96 v1(110.04,103.96) ; v1@91.25,104.525 ccw(c91.25,105.189) 91.719,104.719 ccw(c92.189,104.25) v1@91.525,104.25 ; pad.ICT@105.825,104 ccw(c104.799,104) 105.524,104.726 ccw(c106.25,105.451) pad.ICT@106.25,104.425 ; pad.ICT@106.551,103.699 cw(c107.179,103.071) 107.179,103.96 ; pad.ICT@106.551,104.301 ccw(c107.373,105.123) 107.373,103.96 ; v1@109.846,103.766 ccw(c109.376,103.296) 109.376,103.96 ccw(c109.376,104.624) v1@109.846,104.154
NetRC510_2: pad.ICT@121.25,157.25 RC510.2 UC4.15 | length 13.4
  Top Layer w0.25: v1(121,154.225) UC4.15@123.1,154.225 ; v1@121.194,154.031 cw(c121.664,153.561) 121.664,154.225 cw(c121.664,154.889) v1@121.194,154.419
  Bottom Layer w0.25: RC510.2@120.67,155.22 cw(c119.874,154.424) v1@121,154.424 ; RC510.2@120.67,155.78 ccw(c120.115,156.335) 120.9,156.335 ccw(c121.685,156.335) RC510.2@121.13,155.78 ; v1@120.806,154.419 ccw(c120.336,154.889) 121,154.889 ccw(c121.664,154.889) v1@121.194,154.419 ; RC510.2@120.9,155.465 cw(c122.917,155.465) pad.ICT@121.54,156.939 ; RC510.2@120.9,155.5 120.9,156.9 pad.ICT@121.25,157.25 ; 120.9,156.041 cw(c122.379,156.041) pad.ICT@121.369,157.122 ; 120.9,156.617 cw(c121.842,156.617) pad.ICT@121.199,157.305 ; v1(121,154.225) RC510.2@121,155.4 ; 121,154.907 cw(c121.443,154.907) RC510.2@121.13,155.22
NetRC512_2: pad.ICT@121,150.5 RC512.2 UC4.14 | length 12
  Top Layer w0.25: v1@120.806,151.944 ccw(c120.336,152.414) 121,152.414 ccw(c121.664,152.414) v1@121.194,151.944 ; v1(121,151.75) 121,153 121.575,153.575 UC4.14@123.1,153.575 UC4.14@123.05,153.525
  Bottom Layer w0.25: RC512.2@120.67,152.72 cw(c119.874,151.924) v1@121,151.924 ; pad.ICT@120.699,150.801 ccw(c119.974,151.526) 121,151.526 ccw(c122.026,151.526) pad.ICT@121.301,150.801 ; v1@120.806,151.556 cw(c120.336,151.086) 121,151.086 cw(c121.664,151.086) v1@121.194,151.556 ; v1@120.806,151.944 ccw(c120.336,152.414) 121,152.414 ccw(c121.664,152.414) v1@121.194,151.944 ; pad.ICT@121,150.5 v1(121,151.75) RC512.2@121,152.9 ; 121,152.407 cw(c121.443,152.407) RC512.2@121.13,152.72
NetRC516_2: pad.ICT@50.75,236.5 RC516.2 UC1.9 | length 12.5
  Top Layer w0.25: RC516.2@49.83,234.52 cw(c50.385,233.965) 50.385,234.75 cw(c50.385,235.535) RC516.2@49.83,234.98 ; 50.148,234.75 ccw(c50.148,235.522) v1@50.731,235.016 ; v1@50.542,235.18 cw(c49.6,235.997) RC516.2@49.6,234.75 50.5,234.75 v1(50.75,235) 50.75,236.466 51.088,236.804 UC1.9@52.279,236.804 ; v1@50.556,235.194 ccw(c50.086,235.664) 50.75,235.664 ccw(c51.414,235.664) v1@50.944,235.194
  Bottom Layer w0.25: pad.ICT@50.449,236.199 cw(c49.724,235.474) 50.75,235.474 cw(c51.776,235.474) pad.ICT@51.051,236.199 ; v1@50.556,235.194 ccw(c50.086,235.664) 50.75,235.664 ccw(c51.414,235.664) v1@50.944,235.194 ; v1(50.75,235) pad.ICT@50.75,236.5
NetRC517_2: pad.ICT@53,233 RC517.2 UC1.8 | length 13.5
  Top Layer w0.25: RC517.2@49.85,236.5 50.142,236.5 ; RC517.2@49.925,236.29 cw(c50.142,236.283) 50.142,236.5 ; v1@54.056,234.444 ccw(c53.586,234.914) 54.25,234.914 ccw(c54.914,234.914) v1@54.444,234.444 ; v1(54.25,234.25) 54.25,237 53.796,237.454 UC1.8@52.279,237.454 51.096,237.454 50.142,236.5
  Bottom Layer w0.25: pad.ICT@53,233 v1(54.25,234.25) ; pad.ICT@53,233.425 ccw(c53,234.451) 53.726,233.726 ccw(c54.451,233) pad.ICT@53.425,233 ; v1@53.975,234.25 cw(c53.311,234.25) 53.781,233.781 cw(c54.25,233.311) v1@54.25,233.975
NetRC520_1: pad.ICT@56.25,233 RC520.1 UC1.6 UC52.6 UC52.9 | length 45.6
  Top Layer w0.25: UC52.9@44.6,222.21 46.21,222.21 46.546,222.546 46.546,237.188 47.108,237.75 50.108,237.75 51.112,238.754 UC1.6@52.279,238.754 53.698,238.754 55.05,237.402 v1(55.05,233) ; UC52.9@45.524,222.086 cw(c45.822,221.788) 45.822,222.21 cw(c45.822,222.632) UC52.9@45.524,222.334 ; v1@54.856,233.194 ccw(c54.386,233.664) 55.05,233.664 ccw(c55.714,233.664) v1@55.244,233.194
  Top Layer w0.5: RC520.1@36.6,222 36.81,222.21 UC52.9@44.6,222.21 ; RC520.1@36.741,221.909 cw(c37.469,221.181) 37.469,222.21
  Bottom Layer w0.25: v1(55.05,233) pad.ICT@56.55,233 ; v1@55.244,232.806 cw(c55.714,232.336) 55.714,233 cw(c55.714,233.664) v1@55.244,233.194 ; pad.ICT@55.949,232.699 ccw(c55.224,231.974) 55.224,233 ccw(c55.224,234.026) pad.ICT@55.949,233.301
NetRC521_1: pad.ICT@41.5,222 RC521.1 UC1.7 UC52.5 UC52.8 | length 37.2
  Top Layer w0.25: UC52.8@44.6,220.94 45.94,220.94 47,222 47,237 47.296,237.296 50.296,237.296 51.104,238.104 UC1.7@52.279,238.104 ; UC52.8@45.524,220.816 cw(c45.822,220.518) 45.822,220.94 cw(c45.822,221.362) UC52.8@45.524,221.064
  Top Layer w0.5: RC521.1@36.6,223.48 v1@41.25,223.48 ; RC521.1@36.741,223.641 ccw(c37.131,224.031) 37.131,223.48 ; 40.84,223.48 ccw(c40.84,223.91) v1@41.144,223.606 ; v1(42.5,220.94) UC52.8@44.6,220.94
  Bottom Layer w0.5: v1@41.25,223.328 ccw(c42.828,223.328) pad.ICT@41.712,222.212 ; v1(41.25,223.5) 41.25,222.19 v1(42.5,220.94) ; pad.ICT@41.5,221.7 cw(c41.5,221.121) 41.91,221.53 ; pad.ICT@41.8,222 ccw(c42.669,222) 42.055,221.385
NetRC522_1: pad.ICT@44,233 RC522.1 UC1.5 UC51.10 UC52.3 | length 35.5
  Top Layer w0.25: UC52.3@39.4,226.02 41.25,226.02 42,226.77 42,232.25 42.75,233 v1(45.25,233) 46.094,233.844 46.094,237.73 ; UC52.3@40.324,225.896 cw(c40.622,225.598) 40.622,226.02 cw(c40.622,226.442) UC52.3@40.324,226.144 ; UC51.10@44.6,237.73 46.094,237.73 ; v1@45.056,232.806 ccw(c44.586,232.336) 44.586,233 ccw(c44.586,233.664) v1@45.056,233.194 ; v1@45.25,233.275 ccw(c45.25,233.939) 45.719,233.469 ccw(c46.189,233) v1@45.525,233 ; UC51.10@45.524,237.606 cw(c45.822,237.308) 45.822,237.73 cw(c45.822,238.152) UC51.10@45.524,237.854 ; 48.974,238.474 ccw(c48.249,239.2) RC522.1@49.275,239.2 ; 49.216,238.716 cw(c49.6,238.332) RC522.1@49.6,238.875 ; RC522.1@49.83,239.02 cw(c50.385,238.465) 50.385,239.25 cw(c50.385,240.035) RC522.1@49.83,239.48 ; 51.245,239.303 cw(c51.429,239.118) UC1.5@51.429,239.379 ; UC1.5@52.279,239.404 51.346,239.404 51.192,239.25 RC522.1@49.6,239.25 49.6,239.1 48.75,238.25 46.969,238.25 46.449,237.73 46.094,237.73
  Bottom Layer w0.25: pad.ICT@44,233 v1(45.25,233) ; pad.ICT@44.301,232.699 cw(c45.026,231.974) 45.026,233 cw(c45.026,234.026) pad.ICT@44.301,233.301 ; v1@45.056,232.806 ccw(c44.586,232.336) 44.586,233 ccw(c44.586,233.664) v1@45.056,233.194
NetRC523_1: pad.ICT@48,235.5 RC523.1 UC1.4 UC51.8 UC52.1 | length 35.2
  Top Layer w0.25: UC52.1@39.4,228.56 41.119,228.56 41.55,228.99 41.55,233.05 43.69,235.19 UC51.8@44.6,235.19 ; UC52.1@40.324,228.436 cw(c40.623,228.138) 40.623,228.56 cw(c40.622,228.982) UC52.1@40.324,228.684 ; v1@42.725,234.5 cw(c42.061,234.5) 42.531,234.031 cw(c43,233.561) v1@43,234.225 ; v1@43,234.775 ccw(c43,235.439) 43.469,234.969 ccw(c43.939,234.5) v1@43.275,234.5 ; 43.313,234.813 cw(c43.8,234.327) UC51.8@43.8,235.015 ; v1(50.804,240.054) UC1.4@52.279,240.054 ; v1@50.998,239.86 cw(c51.468,239.39) 51.468,240.054 cw(c51.468,240.718) v1@50.998,240.248
  Bottom Layer w0.25: v1(43,234.5) 47,234.5 49.6,237.1 49.6,240.15 ; v1@43.194,234.306 cw(c43.664,233.836) 43.664,234.5 cw(c43.664,235.164) v1@43.194,234.694 ; pad.ICT@47.575,235.5 cw(c46.549,235.5) 47.274,234.774 cw(c48,234.049) pad.ICT@48,235.075 ; pad.ICT@48,235.925 ccw(c48,236.951) 48.726,236.226 ccw(c49.451,235.5) pad.ICT@48.425,235.5 ; RC523.1@49.37,240.47 cw(c48.815,239.915) 49.6,239.915 cw(c50.385,239.915) RC523.1@49.83,240.47 ; RC523.1@49.6,240.75 49.6,240.15 ; v1@50.61,239.86 ccw(c50.14,239.39) 50.14,240.054 ccw(c50.14,240.718) v1@50.61,240.248 ; v1(50.804,240.054) 49.696,240.054 49.6,240.15
NetRC524_1: pad.ICT@48.75,242.5 RC524.1 UC1.3 UC51.5 UC51.11 | length 29.1
  Top Layer w0.25: UC51.11@44.6,239 45.5,239 46.7,240.2 46.7,241.564 46.936,241.8 48.55,241.8 RC524.1@49.6,240.75 ; UC51.11@45.4,239.175 ccw(c45.4,239.839) 45.869,239.369 ; 45.854,239.354 cw(c46.75,238.458) v1@46.75,239.725 ; 46.281,239.781 cw(c46.75,239.311) v1@46.75,239.975 ; 48.96,241.39 ccw(c49.6,242.03) RC524.1@49.6,241.125 ; 49.081,241.269 cw(c48.611,240.8) RC524.1@49.275,240.8 ; RC524.1@49.646,240.704 RC524.1@49.6,240.75 ; RC524.1@49.653,240.747 cw(c50.264,240.136) 50.264,241 ; RC524.1@49.83,240.57 cw(c50.867,239.533) 50.867,241 ; 51.019,240.885 ccw(c51.398,241.265) UC1.3@51.428,240.729 ; UC1.3@52.279,240.704 51.2,240.704 50.904,241 49.85,241 RC524.1@49.6,240.75
  Top Layer w0.5: 40.98,237.73 UC51.5@39.4,237.73 41.73,237.73 43,239 UC51.11@44.6,239
  Bottom Layer w0.25: v1@46.556,240.194 ccw(c46.086,240.664) 46.75,240.664 ccw(c47.414,240.664) v1@46.944,240.194 ; v1(46.75,240) 46.75,241.25 48,242.5 ; pad.ICT@48.385,242.282 ccw(c48,242.051) 48,242.5 ; pad.ICT@48.385,242.718 cw(c48,242.949) 48,242.5 ; pad.ICT@48.75,242.25 48.5,242.5 48,242.5
NetRC525_1: pad.ICT@42.5,238.75 RC525.1 UC1.2 UC51.6 UC51.12 | length 33.7
  Top Layer w0.25: UC51.12@44.6,240.27 45.995,240.27 46.25,240.525 46.25,241.75 46.75,242.25 49.6,242.25 ; UC51.12@45.524,240.146 cw(c45.822,239.848) 45.822,240.27 cw(c45.822,240.692) UC51.12@45.524,240.394 ; RC525.1@49.37,242.97 cw(c48.815,242.415) 49.6,242.415 cw(c50.385,242.415) RC525.1@49.83,242.97 ; RC525.1@49.6,243.25 49.6,242.25 ; 50.972,241.568 ccw(c51.429,242.025) UC1.2@51.429,241.379 ; UC1.2@52.279,241.354 51.186,241.354 50.29,242.25 49.6,242.25
  Top Layer w0.5: UC51.6@39.4,236.46 v1(40.98,236.46) ; v1(43,240.25) UC51.12@44.58,240.25
  Bottom Layer w0.25: v1(40.98,236.46) 43,238.48 v1(43,240.25) cw(c41.746,240.25) pad.ICT@42.309,239.13 ; v1@40.98,236.735 ccw(c40.98,237.399) 41.449,236.929 ccw(c41.919,236.46) v1@41.255,236.46 ; 41.365,236.845 ccw(c39.638,238.572) pad.ICT@42.076,238.724 ; 41.757,237.237 ccw(c40.376,238.618) pad.ICT@42.325,238.739 ; 42.149,237.629 ccw(c41.114,238.664) pad.ICT@42.575,238.755 ; pad.ICT@42.421,238.906 ccw(c41.95,239.845) 43,239.845 ; pad.ICT@42.534,238.683 ccw(c42.154,239.439) 43,239.439 ; 42.541,238.021 ccw(c41.852,238.71) pad.ICT@42.824,238.77 ; pad.ICT@42.646,238.46 ccw(c42.357,239.034) 43,239.034 ; 42.758,238.236 ccw(c42.561,238.628) pad.ICT@43,238.628 ; v1@42.806,240.056 cw(c42.336,239.586) 43,239.586 cw(c43.664,239.586) v1@43.194,240.056 ; pad.ICT@42.933,238.413 ccw(c42.59,238.756) 43.074,238.786
NetRC533_2: pad.ICT@69.5,157.257 RC533.2 UC50.1 UC50.6 | length 23.3
  Top Layer w0.25: UC50.6@68.65,152.46 69.985,152.46 72,154.475 72,157 v1(71.372,157.628) 70.19,158.81 ; UC50.6@69.574,152.336 cw(c69.872,152.038) 69.872,152.46 cw(c69.872,152.882) UC50.6@69.574,152.584 ; v1@71.097,157.628 ccw(c70.433,157.628) 70.902,158.098 ccw(c71.372,158.567) v1@71.372,157.903 ; v1@71.372,157.353 cw(c71.372,156.69) 71.841,157.159 cw(c72.31,157.628) v1@71.647,157.628
  Top Layer w0.5: RC533.2@66.491,158.659 cw(c66.857,158.293) 66.857,158.81 ; RC533.2@66.491,158.941 ccw(c66.809,159.259) 66.809,158.81 ; RC533.2@66.6,158.81 UC50.1@68.65,158.81 70.19,158.81
  Bottom Layer w0.25: pad.ICT@69.446,157.309 cw(c70.197,156.587) 70.197,157.628 ; pad.ICT@69.5,157.257 69.872,157.628 v1(71.372,157.628) ccw(c71.371,155.457) pad.ICT@69.806,156.962 ; pad.ICT@69.626,157.136 cw(c70.784,156.022) 70.784,157.628 ; v1@71.177,157.434 ccw(c70.708,156.965) 70.708,157.628 ccw(c70.708,158.292) v1@71.177,157.823
NetRC618_2: pad.ICT@99.5,109.25 RC618.2 UC66.1 UC643.2 | length 30.3
  Top Layer w0.5: UC643.2@84.15,109.04 UC643.2@84.4,109.04 v1(86,109.04) ; RC618.2@103.66,110.31 v1(104.75,110.31) UC66.1@106.4,110.31 ; RC618.2@103.741,110.159 cw(c104.107,109.793) 104.107,110.31 ; RC618.2@103.741,110.441 ccw(c104.059,110.759) 104.059,110.31
  Bottom Layer w0.25: v1(86,109.04) 86.71,109.75 91.75,109.75 92.25,109.25 101.75,109.25 102.81,110.31 v1(104.75,110.31) ; v1@86,109.315 ccw(c86,109.979) 86.469,109.509 ccw(c86.939,109.04) v1@86.275,109.04 ; pad.ICT@99.199,108.949 ccw(c98.474,108.224) 98.474,109.25 ccw(c98.474,110.276) pad.ICT@99.199,109.551 ; pad.ICT@99.801,108.949 cw(c100.526,108.224) 100.526,109.25 cw(c100.526,110.276) pad.ICT@99.801,109.551 ; v1@104.556,110.116 ccw(c104.086,109.646) 104.086,110.31 ccw(c104.086,110.974) v1@104.556,110.504
NetRC619_2: pad.ICT@95.5,106.5 RC619.2 UC66.4 UC643.4 | length 29.4
  Top Layer w0.5: UC643.4@84.4,106.5 v1(85.96,106.5) ; RC619.2@103.6,106.5 v1(104.75,106.5) UC66.4@106.4,106.5 ; RC619.2@103.741,106.159 cw(c104.566,105.334) v1@104.566,106.5
  Bottom Layer w0.25: v1(85.96,106.5) v1(104.75,106.5) ; v1@86.154,106.306 cw(c86.624,105.836) 86.624,106.5 cw(c86.624,107.164) v1@86.154,106.694 ; pad.ICT@95.199,106.199 ccw(c94.474,105.474) 94.474,106.5 ccw(c94.474,107.526) pad.ICT@95.199,106.801 ; pad.ICT@95.801,106.199 cw(c96.526,105.474) 96.526,106.5 cw(c96.526,107.526) pad.ICT@95.801,106.801 ; v1@104.556,106.306 ccw(c104.086,105.836) 104.086,106.5 ccw(c104.086,107.164) v1@104.556,106.694
NetRC625_2: pad.ICT@108.75,105.25 RC625.2 UC66.10 UC643.5 | length 37.8
  Top Layer w0.5: UC643.5@84.4,105.23 v1(85.96,105.23) ; v1(110.02,105.23) UC66.10@111.6,105.23 113.48,105.23 114.25,106 RC625.2@115.15,106 ; RC625.2@115.009,105.859 ccw(c114.667,105.517) 114.667,106 ccw(c114.667,106.483) RC625.2@115.009,106.141
  Bottom Layer w0.25: v1(85.96,105.23) 86.78,106.05 91.18,106.05 92,105.23 v1(110.02,105.23) ; v1@85.96,105.505 ccw(c85.96,106.169) 86.429,105.699 ccw(c86.899,105.23) v1@86.235,105.23 ; 107.676,105.23 ccw(c107.676,106.324) pad.ICT@108.449,105.551 ; 107.772,105.23 cw(c107.772,104.272) pad.ICT@108.449,104.949 ; pad.ICT@109.051,104.949 cw(c109.728,104.272) v1@109.728,105.23 ; pad.ICT@109.051,105.551 ccw(c109.824,106.324) v1@109.824,105.23 ; v1@109.826,105.036 ccw(c109.356,104.566) 109.356,105.23 ccw(c109.356,105.894) v1@109.826,105.424
NetRC639_1: pad.ICT@111.25,182.75 RC639.1 TP64.1 UC73.56 | length 22.1
  Top Layer w0.25: UC73.56@104.55,174.75 105.909,174.75 107.3,176.141 107.3,180.55 TP64.1@108.75,182 109.5,182.75 RC639.1@110.9,182.75 ; TP64.1@108.075,182 cw(c106.445,182) 107.598,180.848 cw(c108.75,179.695) TP64.1@108.75,181.325 ; TP64.1@108.325,182 cw(c107.299,182) 108.024,181.274 cw(c108.75,180.549) TP64.1@108.75,181.575 ; RC639.1@110.67,182.52 ccw(c110.115,181.965) 110.115,182.75 ccw(c110.115,183.535) RC639.1@110.67,182.98
  Bottom Layer w0.25: TP64.1@108.75,182 109.5,182.75 pad.ICT@111.25,182.75 ; pad.ICT@110.949,182.449 ccw(c110.224,181.724) 110.224,182.75 ccw(c110.224,183.776) pad.ICT@110.949,183.051
NetRC653_1: pad.ICT@104.35,178.6 RC653.1 TP65.1 UC73.61 | length 18.2
  Top Layer w0.25: UC73.61@102.75,178.55 102.75,179.25 v1(103.5,180) 104,180.5 TP65.1@104,182.25 ; v1@103.225,180 cw(c102.561,180) 103.031,179.531 cw(c103.5,179.061) v1@103.5,179.725 ; v1@103.5,180.275 ccw(c103.5,180.939) 103.969,180.469 ccw(c104.439,180) v1@103.775,180 ; TP65.1@103.523,181.773 cw(c102.37,180.62) 104,180.62 cw(c105.63,180.62) TP65.1@104.477,181.773 ; TP65.1@103.699,181.949 cw(c102.974,181.224) 104,181.224 cw(c105.026,181.224) TP65.1@104.301,181.949
  Bottom Layer w0.25: RC653.1@102.25,178.75 RC653.1@102.25,178.6 103.35,178.6 ; RC653.1@102.53,178.37 cw(c103.085,177.815) 103.085,178.6 cw(c103.085,179.385) RC653.1@102.53,178.83 ; v1@103.306,179.806 cw(c102.836,179.336) 103.5,179.336 cw(c104.164,179.336) v1@103.694,179.806 ; v1(103.5,180) 103.5,178.75 ; 103.65,178.6 103.5,178.75 ; pad.ICT@104.044,178.305 ccw(c103.35,177.636) 103.35,178.6 ; pad.ICT@104.044,178.895 cw(c103.35,179.564) 103.35,178.6 ; pad.ICT@104.35,178.6 103.35,178.6 ; 103.35,178.6 103.5,178.75